# Altium PCB HeadingUnit.PcbDoc
Units mm, origin at the board's own origin, x right, y up, seen from the top; angles counter-clockwise.
Board outline 35 x 50 mm, 2 copper layers (Top Layer, Bottom Layer); 42 components, 35 nets, 183 pads, 53 vias.
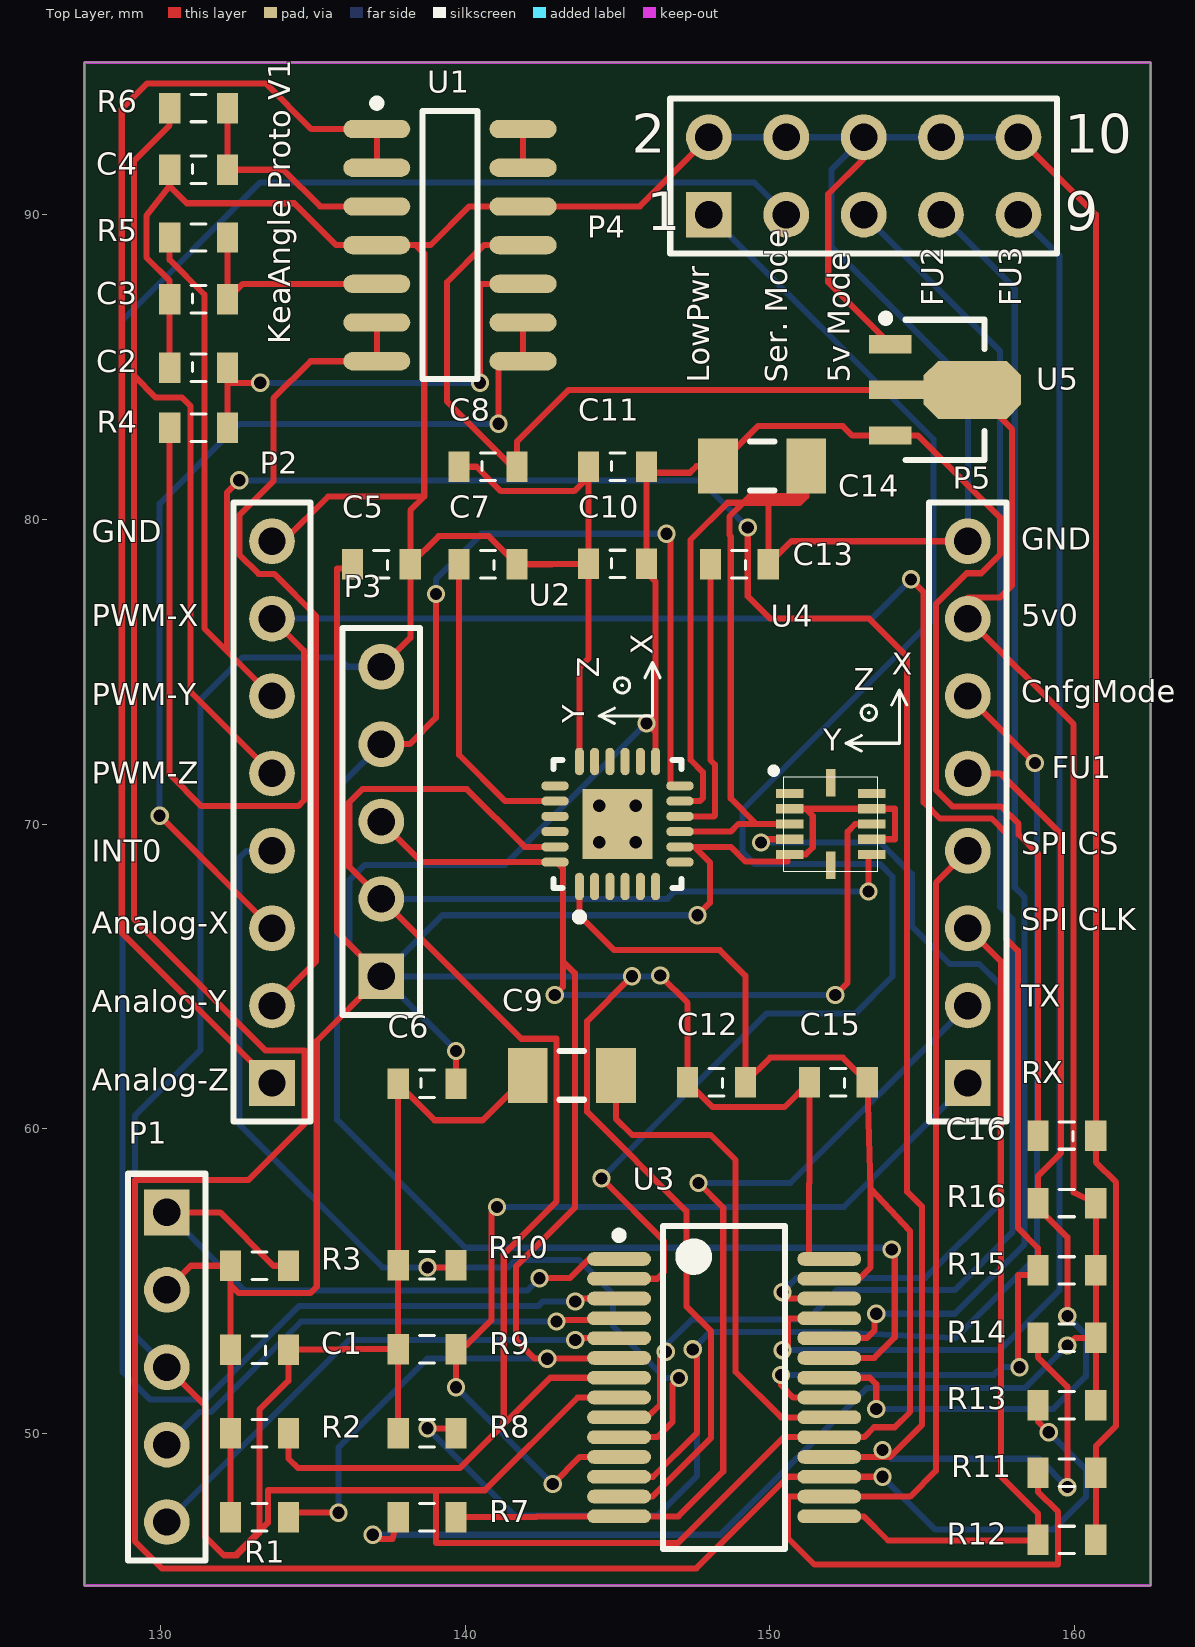
[diagram p0: Top Layer view]
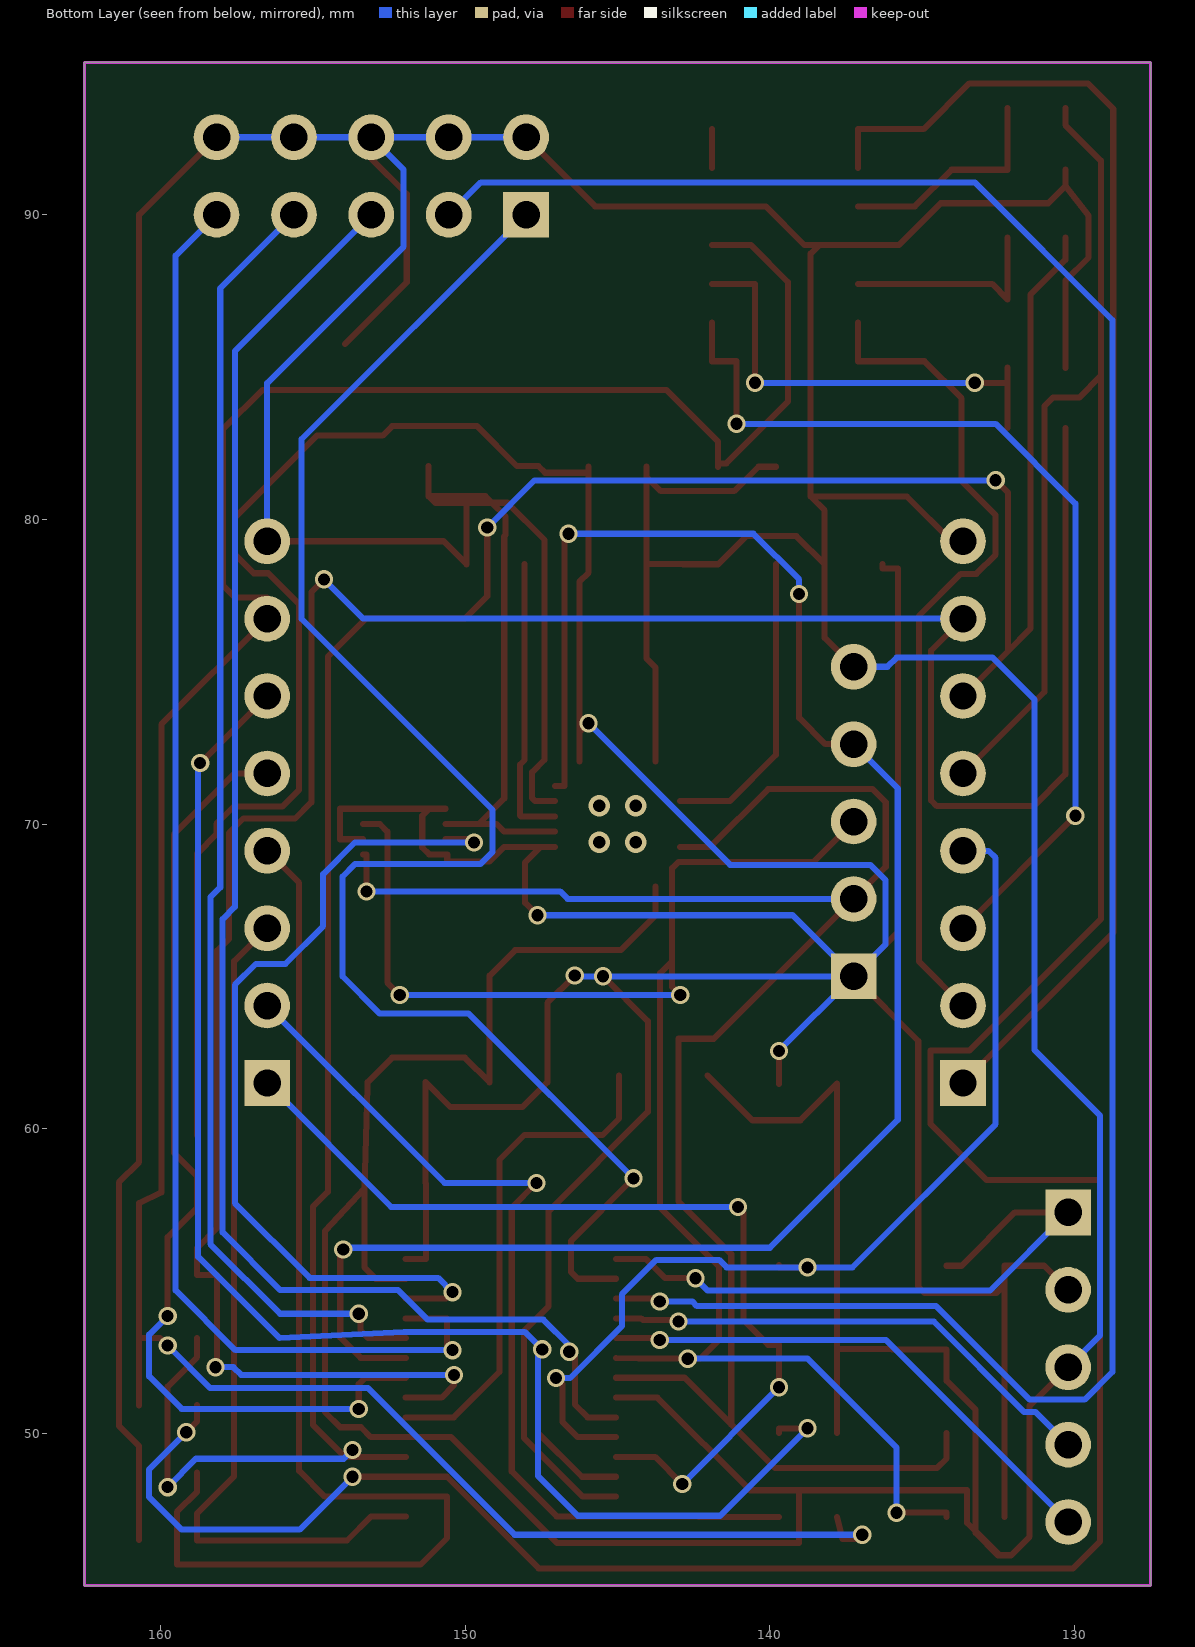
[diagram p1: Bottom Layer view, seen from below]
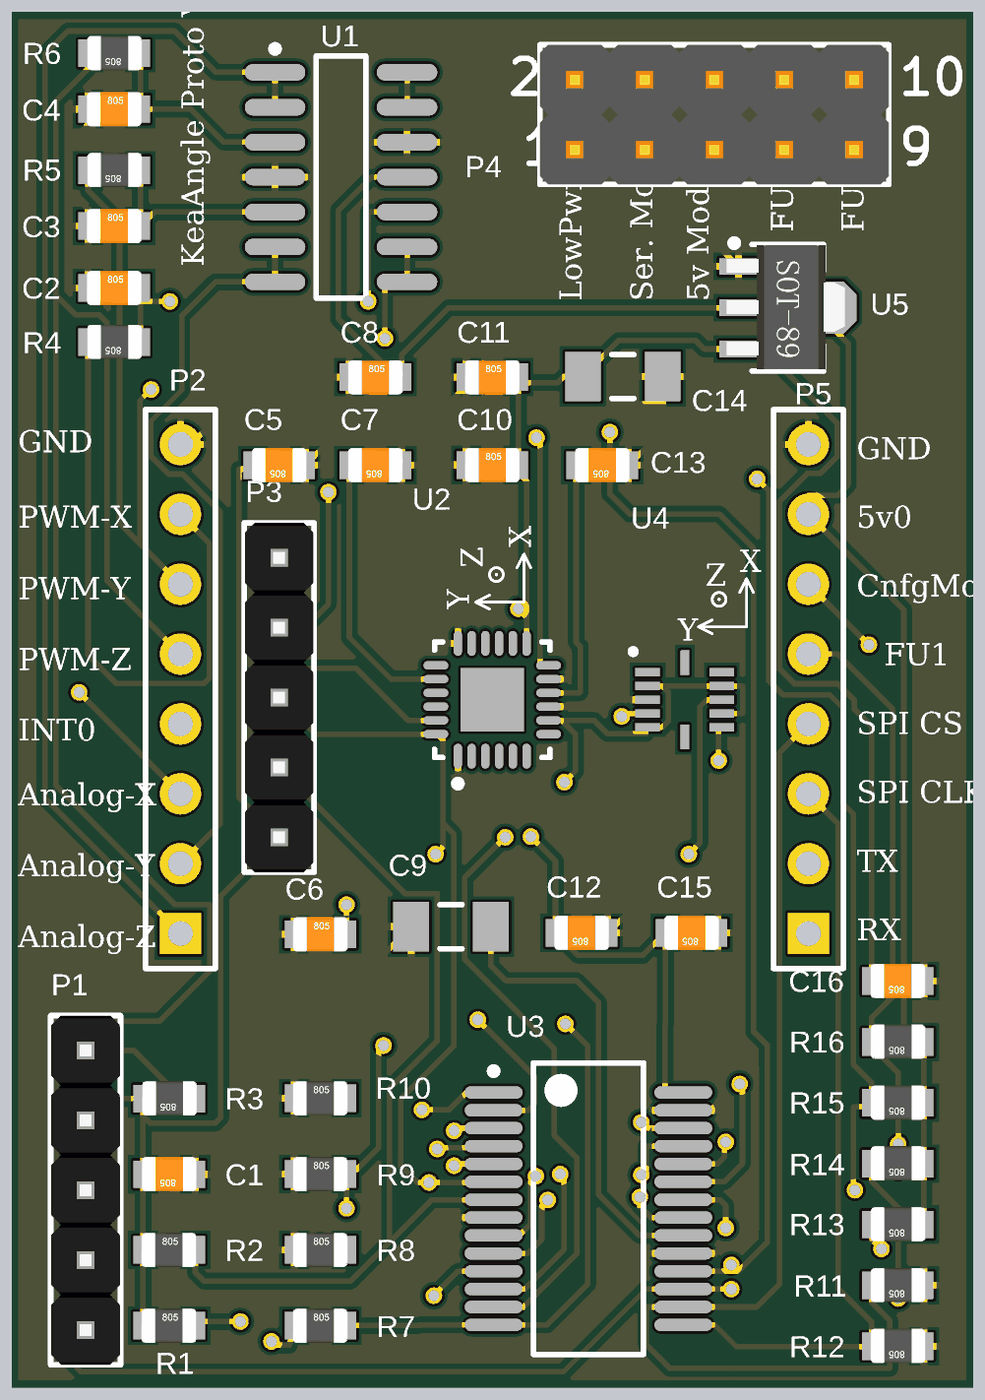
[diagram p2: 3D render of the assembled board from above, using the file's embedded part models]

## Layer stack, top to bottom
Top Layer: signal copper 0.0356
Dielectric: dielectric 0.32, FR-4, Dk 4.8
Bottom Layer: signal copper 0.0356

## Board outline
127.5,45 162.5,45 162.5,95 127.5,95

## Design rules (kind name [scope] priority, off if disabled: settings)
Clearance [All] p1: gap=0.2
HoleToHoleClearance [All] p1: gap=0.2 allowstackedmicrovias=TRUE
MinimumAnnularRing [All] p1: minimumring=0.1
MinimumSolderMaskSliver [All] p1: minsoldermaskwidth=0.2
PolygonConnect [All] p1: connectstyle=Relief reliefconductorwidth=0.254 reliefentries=4 polygonreliefangle="90 Angle"
RoomDefinition "U_Regulator 3v3-250mA MCP1702" [InComponentClass('U_Regulator 3v3-250mA MCP1702')] p1 off: confinementstyle=ConfineIn formatcopy=TRUE lockcomponents=FALSE outline 137.975,98.95 169.975,98.95 169.975,107.95 137.975,107.95
RoomDefinition "U_PIC programmer in-circuit" [InComponentClass('U_PIC programmer in-circuit')] p2 off: confinementstyle=ConfineIn formatcopy=TRUE lockcomponents=FALSE outline 129,113 150,113 150,130 129,130
RoomDefinition "U_GYRO 3-AXIS - ITG-3200" [InComponentClass('U_GYRO 3-AXIS - ITG-3200')] p3 off: confinementstyle=ConfineIn formatcopy=TRUE lockcomponents=FALSE outline 172,115 233,115 233,132 172,132
RoomDefinition "U_Accelerometer 3-AXIS - BMA180" [InComponentClass('U_Accelerometer 3-AXIS - BMA180')] p4 off: confinementstyle=ConfineIn formatcopy=TRUE lockcomponents=FALSE outline 184.35,85 211.35,85 211.35,107 184.35,107
RoomDefinition "main_gyro+acc only" [InComponentClass('main_gyro+acc only')] p5 off: confinementstyle=ConfineIn formatcopy=TRUE lockcomponents=FALSE outline 54,13.95 232,13.95 232,38.95 54,38.95
RoutingPriority RoutingPriority_1 [(InNet('SDA') AND InNet('SCL'))] p1: routingpriority=1
RoutingPriority [All] p2: routingpriority=2
RoutingVias [All] p1: holewidth=0.4 width=0.6 viastyle="Through Hole" minholewidth=0.4 minwidth=0.6 maxholewidth=1.4 maxwidth=2
SMDNeckDown [All] p1: percent=100.000
SilkToSilkClearance [All] p1: silktosilkclearance=0.2
SilkscreenOverComponentPads [All] p1 off: minsilkscreentomaskgap=0.254
SolderMaskExpansion [All] p1: expansion=0.102
SupplyNets [InNet('GND')] p1: voltage=0.000
Width [All] p1: maxlimit=2 minlimit=0.2 preferedwidth=0.2
23 further rules are at their usual default settings.

## Classes and differential pairs
component class "U_Regulator 3v3-250mA MCP1702": C8 C11 C14 U5
component class "U_PIC programmer in-circuit": C1 P1 R3
component class "U_GYRO 3-AXIS - ITG-3200": C6 C7 C10 C13 P3 R1 R2 U2
component class "U_Accelerometer 3-AXIS - BMA180": C12 C15 U4
component class "main_gyro+acc only": C2 C3 C4 C5 C9 C16 P2 P4 P5 R4 R5 R6 R7 R8 R9 R10 R11 R12 R13 R14 R15 R16 U1 U2.3 U3

## Components (designator, comment, footprint, x,y, rotation, side; value= is the part's Value field where it differs from the comment)
C1 "100n" C0805 133.25,52.723 r180 top (schematic designator C6)
C2 "100n" C0805 131.25,85 r0 top (schematic designator C4)
C3 "100n" C0805 131.25,87.25 r0 top
C4 "100n" C0805 131.25,91.5 r0 top (schematic designator C2)
C5 "100n" C0805 137.25,78.5 r180 top (schematic designator C14)
C6 "100n" C0805 138.75,61.5 r0 top (schematic designator C10)
C7 "2n2" C0805 140.75,78.5 r180 top (schematic designator C9)
C8 "100n" C0805 140.75,81.75 r0 top (schematic designator C11)
C9 "10uF" C1206 143.5,61.75 r0 top (schematic designator C1)
C10 "10n" C0805 145,78.56 r0 top (schematic designator C7)
C11 "100n" C0805 145,81.75 r0 top (schematic designator C12)
C12 "22n" C0805 148.25,61.5 r180 top (schematic designator C6)
C13 "100n" C0805 149,78.5 r180 top (schematic designator C8)
C14 "10uF" C1206 149.75,81.75 r180 top (schematic designator C13)
C15 "22n" C0805 152.25,61.5 r180 top (schematic designator C5)
C16 "100n" C0805 159.75,59.75 r180 top (schematic designator C15)
P1 "Pin Header" PH1x5_2.54 130.21,57.25 r270 top
P2 "Pin Header" PH1x8_2.54 133.66,61.5 r90 top
P3 "Pin Header" PH1x5_2.54 137.25,65 r90 top (schematic designator P5)
P4 "Pin Header" PH2x5_2.54 148,90 r0 top (schematic designator P3)
P5 "Pin Header" PH1x8_2.54 156.5,61.5 r90 top (schematic designator P1)
R1 "RESISTOR" R0805 133.25,47.25 r0 top (schematic designator R14)
R2 "RESISTOR" R0805 133.25,50.007 r0 top (schematic designator R15)
R3 "RESISTOR" R0805 133.25,55.5 r180 top (schematic designator R1)
R4 "RESISTOR" R0805 131.25,83 r180 top (schematic designator R13)
R5 "RESISTOR" R0805 131.25,89.25 r180 top (schematic designator R12)
R6 "RESISTOR" R0805 131.25,93.5 r180 top (schematic designator R11)
R7 "RESISTOR" R0805 138.75,47.25 r0 top (schematic designator R4)
R8 "RESISTOR" R0805 138.75,50.007 r0 top (schematic designator R2)
R9 "RESISTOR" R0805 138.75,52.763 r0 top (schematic designator R3)
R10 "RESISTOR" R0805 138.75,55.52 r0 top (schematic designator R1)
R11 "RESISTOR" R0805 159.75,48.712 r180 top (schematic designator R6)
R12 "RESISTOR" R0805 159.75,46.5 r180 top (schematic designator R5)
R13 "RESISTOR" R0805 159.75,50.923 r180 top (schematic designator R7)
R14 "RESISTOR" R0805 159.75,53.135 r180 top (schematic designator R8)
R15 "RESISTOR" R0805 159.75,55.347 r180 top (schematic designator R9)
R16 "RESISTOR" R0805 159.75,57.558 r180 top (schematic designator R10)
U1 "OPAMP_QUAD" SOIC-14 139.5,89 r0 top (schematic designator U2)
U2 "GYRO 3-AXIS (ITG-3200)" "QFN50P400X400-24V2M - GYRO 3axis" 145,70 r90 top (schematic designator U4)
U3 "PIC24FJ32GA002-E/SS" SSOP-SS28_N 148.5,51.5 r0 top (schematic designator U1)
U4 "Accelerometer 3-AXIS (BMA180)" BMA180 152,70 r0 top (schematic designator U3)
U5 "MCP1702T-3302E/MB" SOT-89-MB3_N 155.75,84.25 r0 top

## Footprints (in the part's own frame and the unit in brackets; to place one, negate y for a bottom-side part, rotate by r counter-clockwise, add the part's x,y. Pads: shape width x height; smd on the part's side, far side on the other; paste and mask are expansions set on the pad)
BMA180 [mm]
  rect 0.9x0.3 smd: 1(-1.35,1) 2(-1.35,0.5) 3(-1.35,0) 4(-1.35,-0.5) 5(-1.35,-1) 7(1.35,-1) 8(1.35,-0.5) 9(1.35,0) 10(1.35,0.5) 11(1.35,1)
  rect 0.32x0.9 smd: 6(0,-1.35) 12(0,1.35)
  silkscreen extent -1.95,-1.55 2.5,4.4, body extent -1.55,-1.55 1.55,1.55, height 1
C0805 [mm] "Chip Capacitor; Body 2.0 x 1.2 mm (LxW typ)"
  rect 0.7x1 smd: 1(-0.95,-0.025) 2(0.95,-0.025)
  silkscreen extent -0.25,-0.47 0.25,0.42, body extent -1,-0.65 1,0.6, height 0.78
C1206 [mm] "Chip Capacitor, Body 3.2x1.6mm, IPC Medium Density"
  rect 1.3x1.8 smd: 1(-1.45,0) 2(1.45,0)
  silkscreen extent -0.4,-0.8 0.4,0.8, body extent -1.7,-0.9 1.7,0.9, height 1.35
PH1x5_2.54 [mm] "Connector; Header; 5 Position"
  rect 1.5x1.5 hole 0.9: 1(0,0)
  round 1.5 hole 0.9: 2(2.54,0) 3(5.08,0) 4(7.62,0) 5(10.16,0)
  silkscreen extent -1.27,-1.27 11.43,1.27, body extent -1.27,-1.25 11.43,1.25, height 8.52
PH1x8_2.54 [mm] "Connector; Header; 8 Position"
  rect 1.5x1.5 hole 0.9: 1(0,0)
  round 1.5 hole 0.9: 2(2.54,0) 3(5.08,0) 4(7.62,0) 5(10.16,0) 6(12.7,0) 7(15.24,0) 8(17.78,0)
  silkscreen extent -1.27,-1.27 19.05,1.27
PH2x5_2.54 [mm] "Connector; Header; 5x2 Position"
  rect 1.5x1.5 hole 0.9: 1(0,0)
  round 1.5 hole 0.9: 2(0,2.54) 3(2.54,0) 4(2.54,2.54) 5(5.08,0) 6(5.08,2.54) 7(7.62,0) 8(7.62,2.54) 9(10.16,0) 10(10.16,2.54)
  silkscreen extent -1.27,-1.27 11.43,3.81, body extent -1.27,-1.27 11.43,3.81, height 10.1
"QFN50P400X400-24V2M - GYRO 3axis" [mm] "QFN, 24-Leads, Body 4x4mm, Pitch 0.5mm, IPC Low Density"
  oval 0.9x0.3 smd: 1(-2.05,1.25) 2(-2.05,0.75) 3(-2.05,0.25) 4(-2.05,-0.25) 5(-2.05,-0.75) 6(-2.05,-1.25) 13(2.05,-1.25) 14(2.05,-0.75) 15(2.05,-0.25) 16(2.05,0.25) 17(2.05,0.75) 18(2.05,1.25)
  oval 0.3x0.9 smd: 7(-1.25,-2.05) 8(-0.75,-2.05) 9(-0.25,-2.05) 10(0.25,-2.05) 11(0.75,-2.05) 12(1.25,-2.05) 19(1.25,2.05) 20(0.75,2.05) 21(0.25,2.05) 22(-0.25,2.05) 23(-0.75,2.05) 24(-1.25,2.05)
  rect 2.3x2.3 smd: 25(0,0)
  silkscreen extent -3.17,-2.1 5.3,2.1, body extent -2.07,-2.07 2.07,2.07, height 1
R0805 [mm] "0805 SMD Resistor"
  rect 0.7x1 smd: 1(-0.95,0) 2(0.95,0)
  silkscreen extent -0.25,-0.45 0.25,0.45, body extent -1.01,-0.63 0.99,0.62, height 0.78
SOIC-14 [mm] "14-Pin Plastic Narrow Body Small Outline Integrated Circuit 1.27 mm Pitch, IPC Medium Density"
  oval 2.2x0.6 smd: 1(-2.4,3.81) 2(-2.4,2.54) 3(-2.4,1.27) 4(-2.4,0) 5(-2.4,-1.27) 6(-2.4,-2.54) 7(-2.4,-3.81) 8(2.4,-3.81) 9(2.4,-2.54) 10(2.4,-1.27) 11(2.4,0) 12(2.4,1.27) 13(2.4,2.54) 14(2.4,3.81)
  silkscreen extent -2.52,-4.4 0.9,4.78, body extent -1.95,-4.33 1.95,4.33, height 1.76
SOT-89-MB3_N [mm] "SOT89, 3-Leads, Body 4.5x2.4 mm, Pitch 1.5mm, Lead Span 4.1mm, IPC Medium Density"
  rect 1.4x0.6 smd: 1(-1.8,1.5) 3(-1.8,-1.5)
  rect 1.8x0.6 smd: 2(-1.6,0)
  oct 3.2x1.9 smd: 2(0.9,0)
  silkscreen extent -2.07,-2.3 1.3,2.47, body extent -2.22,-2.23 2.08,2.27, height 1.51
SSOP-SS28_N [mm] "SOP, 28-Leads, Body 10.2x5.2mm, Pitch 0.65mm, IPC Medium Density"
  oval 2.1x0.45 smd: 1(-3.45,4.225) 2(-3.45,3.575) 3(-3.45,2.925) 4(-3.45,2.275) 5(-3.45,1.625) 6(-3.45,0.975) 7(-3.45,0.325) 8(-3.45,-0.325) 9(-3.45,-0.975) 10(-3.45,-1.625) 11(-3.45,-2.275) 12(-3.45,-2.925) 13(-3.45,-3.575) 14(-3.45,-4.225) 15(3.45,-4.225) 16(3.45,-3.575) 17(3.45,-2.925) 18(3.45,-2.275) 19(3.45,-1.625) 20(3.45,-0.975) 21(3.45,-0.325) 22(3.45,0.325) 23(3.45,0.975) 24(3.45,1.625) 25(3.45,2.275) 26(3.45,2.925) 27(3.45,3.575) 28(3.45,4.225)
  silkscreen extent -3.57,-5.3 2,5.3, body extent -2.7,-5.3 2.7,5.3, height 2

## Part data
P1 P3: library part PH1x5, "Con1x5"
P2 P5: library part PH1x8, "Con1x8"
P4: library part PH2x5, "Header, 5-Pin, Dual row"
R1 R2: library part 4K7, "Resistor"
R3 R7 R8 R9 R10 R11 R12 R13 R14 R15 R16: library part 10K, "Resistor"
R4 R5 R6: library part 1K, "Resistor"
U1: library part MCP6244-E/SN, "OpAmp"
U2: library part ITG-3200, "Gyro, 3-axis"
U3: "General Purpose 16-Bit Flash Microcontroller, 32KB Flash, 8KB SRAM, 28-Pin SSOP, Extended Temperature"
U4: library part BMA180
U5: "Power, 250 mA Low Quiescent Current LDO Regulator, 3-Pin SOT-89, Extended Temperature, Tape and Reel"

## Via types
v1: diameter 0.6, hole 0.4, Top Layer to Bottom Layer, 49 vias
v2: diameter 0.7, hole 0.4, Top Layer to Bottom Layer, tented top, 4 vias

## Nets (pads, with @x,y where several pads share a name; then routed paths per layer and width w, separated by ;. In a path a pad name is that pad's centre, name@x,y a point inside that pad or via, vN(x,y) a via of type N, cw(c..) or ccw(c..) an arc to the next point about the centre after c; other vN are vias at no path point)
3V3: C1.2 C5.2 C6.2 C10.2 C11.2 C12.2 C14.2 C15.2 C16.2 P1.2 P3.1 R1.1 R2.1 R3.2 U2.8 U2.13 U3.13 U3.28 U4.2 U4.5 U4.8 U4.10 U5.3 | length 177.6
  Top Layer w0.2: P1.2 131,55.5 R3.2 132.3,54.864 ; R1.1 R2.1 C1.2 132.3,54.864 ; C5.2 136.3,78.384 135.788,78.384 135.788,66.462 P3.1 135.128,62.878 135.128,54.813 134.925,54.61 132.554,54.61 132.3,54.864 ; C6.2 v1(139.7,62.55) ; U3.13 146.147,47.925 148.072,49.851 148.072,53.356 147.26,54.169 147.26,57.294 144,60.554 144,63.527 v1(145.473,65) ; v1(145.95,73.306) 146.25,73.006 ; C11.2 C11.2@145.95,81.53 ; U2.13 146.25,73.006 ; v1(146.406,65.024) 147.3,64.13 C12.2 148.119,60.706 150.481,60.706 C15.2 151.3,58.217 151.282,58.199 151.282,55.725 U3.28 ; U2.8 147.523,69.25 ; v1(147.625,67.005) 148.031,67.412 148.031,68.742 147.523,69.25 ; U4.2 151.181,70.5 ; U4.8 154.102,69.5 154.102,70.5 U4.10 151.181,70.5 ; C16.2 158.8,69.03 158.166,69.665 158.166,70.002 157.588,70.58 155.99,70.58 155.45,71.12 155.45,77.216 156.464,78.23 156.938,78.23 157.55,78.842 157.55,80.067 154.867,82.75 U5.3 152.708,82.75 152.4,83.058 149.608,83.058 C14.2 147.595,81.75 147.375,81.53 C11.2@145.95,81.53 ; C11.2@145.95,81.53 C10.2 145.95,78.25 146.25,77.95 146.25,73.006 ; 147.523,69.25 148.717,69.25 149.198,68.769 150.586,68.769 150.586,69 U4.5 151.181,69 151.409,69.229 151.409,70.271 151.181,70.5
  Bottom Layer w0.2: v1(139.7,62.55) P3.1 ; v1(145.95,73.306) 141.3,68.656 136.703,68.656 136.2,68.153 136.2,66.05 P3.1 ; v1(146.406,65.024) 146.382,65 v1(145.473,65) P3.1 ; v1(147.625,67.005) 139.255,67.005 P3.1
5V0: C8.2 P5.7 R7.1 R13.1 R14.1 R15.1 R16.1 U1.11 U5.2 | length 91.4
  Top Layer w0.2: v1(136.969,46.672) 137.109,46.533 137.617,46.533 R7.1 ; C8.2 C8.2@141.7,81.839 ; U1.11 140.614,89 139.405,87.79 139.405,83.861 141.427,81.839 C8.2@141.7,81.839 ; v1(159.766,52.883) 160.018,53.135 R14.1 ; R13.1 R14.1 ; C8.2@141.7,81.839 141.7,82.55 143.4,84.25 154.15,84.25 156.65,84.25 157.95,82.95 157.95,77.83 157.55,77.43 156.5,77.43 P5.7 159.969,73.271 159.969,57.912 R16.1 R15.1 R14.1
  Bottom Layer w0.2: v1(136.969,46.672) 148.374,46.672 153.187,51.486 158.369,51.486 v1(159.766,52.883)
DAC-OUT1: P2.1 U1.1 U1.2 | length 44.6
  Top Layer w0.2: P2.1 128.727,66.433 128.727,93.472 129.565,94.31 133.452,94.31 134.952,92.81 U1.1 U1.2
DAC-OUT2: P2.2 U1.6 U1.7 | length 27.5
  Top Layer w0.2: P2.2 135.11,65.49 135.11,76.828 133.731,78.207 133.223,78.207 132.588,78.842 132.588,80.137 133.706,81.255 133.706,83.971 134.925,85.19 U1.7 U1.6
DAC-OUT3: P2.3 U1.8 U1.9 | length 31.8
  Top Layer w0.2: v1(129.972,70.268) P2.3 ; v1(141.097,83.134) 141.097,85.19 U1.8 U1.9
  Bottom Layer w0.2: v1(129.972,70.268) 129.972,80.518 132.588,83.134 v1(141.097,83.134)
EXTINTNEWDATA: P2.4 R10.2 U3.10 | length 33.1
  Top Layer w0.2: v1(138.76,55.448) 139.7,55.448 R10.2 ; U3.10 146.304,49.875 146.8,50.371 146.8,51.613 147.003,51.816 v1(147.015,51.816)
  Bottom Layer w0.2: P2.4 132.823,69.12 132.588,68.885 132.588,60.147 137.287,55.448 v1(138.76,55.448) 141.421,55.448 141.665,55.693 143.723,55.693 144.856,54.559 144.856,53.518 146.558,51.816 v1(147.015,51.816)
EXTMODESERIAL: P5.6 R8.2 U3.12 | length 53.8
  Top Layer w0.2: v1(138.76,50.165) 139.7,50.165 R8.2 ; U3.12 146.165,48.575 147.615,50.026 147.615,52.613 v1(147.472,52.756) ; P5.6 v1(158.699,72.001)
  Bottom Layer w0.2: v1(138.76,50.165) 141.63,47.295 146.304,47.295 147.615,48.606 147.615,52.613 v1(147.472,52.756) 148.047,53.33 152.003,53.33 156.095,53.13 158.763,55.798 158.763,71.937 v1(158.699,72.001)
FUTURECHOICE1: P4.7 U3.24 | length 42.9
  Top Layer w0.2: U3.24 153.187,53.125 153.441,53.379 153.441,53.873 v1(153.492,53.924)
  Bottom Layer w0.2: v1(153.492,53.924) 156.077,53.924 158.363,56.21 158.363,67.596 158.039,67.92 158.039,87.581 P4.7
FUTURECHOICE2: P4.9 U3.25 | length 48.2
  Top Layer w0.2: v1(150.419,52.73) 150.597,52.908 150.597,53.775 U3.25
  Bottom Layer w0.2: v1(150.419,52.73) 157.54,52.73 159.502,54.692 159.502,88.658 P4.9
FUTURERPX1: P5.5 R16.2 U3.22 | length 32.4
  Top Layer w0.2: U3.22 153.28,51.825 153.492,51.613 v1(153.492,50.8) ; P5.5 157.563,71.66 159.563,69.66 159.563,59.208 158.8,58.445 R16.2 158.8,57.404 159.766,56.438 v1(159.766,53.848)
  Bottom Layer w0.2: v1(153.492,50.8) 159.309,50.8 160.376,51.867 160.376,53.238 v1(159.766,53.848)
GND: C1.1 C2.1 C3.1 C4.1 C5.1 C6.1 C7.1 C8.1 C9.1 C10.1 C11.1 C12.1 C13.1 C14.1 C15.1 C16.1 P1.3 P2.8 P3.5 P4.2 P4.4 P4.6 P4.8 P4.10 P5.8 R8.1 R9.1 R10.1 R11.1 R12.1 U1.4 U1.12 U2.1 U2.9 U2.11 U2.18 U3.8 U3.19 U3.27 U4.3 U5.1 | length 322.2
  Top Layer w0.2: P1.3 131.47,50.91 131.47,46.609 132.08,45.999 132.461,45.999 ; C2.1 C3.1 130.3,87.833 129.54,88.593 129.54,89.967 130.3,90.934 ; C4.1 130.3,90.934 ; P2.8 134.03,79.28 135.5,80.75 138.659,80.75 ; P3.5 138.2,76.11 C5.1 ; R8.1 R9.1 ; C8.1 140.373,81.725 141.173,80.924 143.574,80.924 C11.1@144.05,81.4 ; C9.1 140.575,60.275 139,60.275 C6.1 R10.1 R9.1 ; U2.1 143.75,67.005 144.893,65.862 148.362,65.862 149.2,65.024 C12.1 150.007,62.332 152.393,62.332 C15.1 153.2,61.366 153.3,58.042 ; U2.18 143.75,75.133 144.05,75.433 C10.1 ; C11.1 C11.1@144.05,81.4 ; U3.8 143.688,51.175 140.646,48.133 139.04,48.133 ; U2.9 148.717,69.75 148.967,70 149.555,70 ; U2.11 147.701,70.75 147.8,70.849 147.8,71.704 147.396,72.108 147.396,79.324 148.615,80.543 149.123,80.543 ; P4.2 145.73,90.27 U1.12 140.132,90.27 138.862,89 138.379,89 ; U4.3 149.555,70 ; C14.1 151.2,80.766 ; U3.27 152.933,55.075 153.3,55.442 153.3,58.042 ; P4.6 153.08,91.841 151.917,90.678 151.917,87.783 U5.1 ; P5.8 150.705,79.28 C13.1 149.95,80.543 ; P4.10 160.7,90 C16.1 160.7,58.903 161.366,58.236 161.366,50.247 160.7,49.581 R11.1 R12.1 ; 130.3,90.934 130.861,90.373 134.391,90.373 135.765,89 U1.4 138.379,89 ; 132.461,45.999 132.512,45.999 133.248,46.736 133.248,46.787 ; 132.461,45.999 133.248,46.787 ; 133.248,46.787 133.528,47.066 133.528,48.133 139.04,48.133 ; 133.248,46.787 133.248,50.775 134.2,51.726 C1.1 135.992,52.748 136.006,52.763 R9.1 ; C5.1 139.126,79.451 140.774,79.451 C7.1 142.85,78.525 142.859,78.535 C10.1 ; C5.1 138.2,80.291 138.659,80.75 ; 138.379,89 138.659,88.721 138.659,80.75 ; 139.04,48.133 139.04,46.406 146.99,46.406 150.459,49.875 U3.19 153.095,49.875 153.419,50.199 154.1,50.199 154.6,50.699 154.6,56.642 153.3,58.042 ; C10.1 C11.1@144.05,81.4 ; 149.123,80.543 149.337,80.757 151.191,80.757 ; 149.123,80.543 149.95,80.543 ; 149.123,80.543 148.676,80.096 148.676,79.48 148.717,79.439 148.717,70.838 149.555,70 ; 149.95,80.543 150.978,80.543 151.19,80.756 ; 149.95,80.543 151.19,80.756 ; 151.19,80.756 151.191,80.757 ; 151.19,80.756 151.2,80.757 ; 151.191,80.757 151.2,80.766 ; 151.191,80.757 151.2,80.757 ; 151.2,80.757 151.2,80.766
  Bottom Layer w0.2: P1.3 129.159,53.221 129.159,60.427 131.318,62.586 131.318,74.092 132.69,75.463 135.839,75.463 136.143,75.16 P3.5 ; P4.2 P4.4 P4.6 ; P5.8 156.5,84.47 152.019,88.951 152.019,91.479 P4.6 ; P4.10 P4.8 P4.6
INT1: U3.26 U4.4 | length 28.9
  Top Layer w0.2: v1(149.708,69.393) 149.815,69.5 U4.4 ; v1(150.419,54.635) 150.629,54.425 U3.26
  Bottom Layer w0.2: v1(149.708,69.393) 153.619,69.393 154.661,68.351 154.661,66.65 155.905,65.405 156.87,65.405 157.556,64.719 157.556,57.554 155.106,55.104 150.887,55.104 v1(150.419,54.635)
INT2: P3.4 U2.12 U3.23 | length 61.8
  Top Layer w0.2: P3.4 138.177,72.62 139.04,73.482 v1(139.04,77.546) ; v1(146.609,79.527) 146.736,79.4 146.736,71.25 U2.12 ; U3.23 153.428,52.475 154.1,53.147 154.1,55.933 v1(154,56.032)
  Bottom Layer w0.2: P3.4 135.8,71.17 135.8,60.288 139.995,56.093 153.94,56.093 v1(154,56.032) ; v1(139.04,77.546) 139.04,78.029 140.538,79.527 v1(146.609,79.527)
JP-LOWPWR: P4.1 U3.2 | length 52.9
  Top Layer w0.2: v1(144.475,58.369) 146.533,56.312 146.533,55.304 146.304,55.075 U3.2
  Bottom Layer w0.2: v1(144.475,58.369) 149.885,63.779 152.806,63.779 154.026,64.999 154.026,68.275 153.619,68.682 149.504,68.682 149.098,69.088 149.098,70.46 155.372,76.733 155.372,82.628 P4.1
JP-MODE3V3OR5\V\0\: P4.5 U3.9 | length 51.9
  Top Layer w0.2: U3.9 145.978,50.525 146.4,50.947 146.4,52.496 v1(146.583,52.68)
  Bottom Layer w0.2: v1(146.583,52.68) 146.583,52.883 147.431,53.73 151.23,53.73 152.203,54.704 156.069,54.704 157.963,56.597 157.963,66.878 157.556,67.285 157.556,85.524 P4.5
JP-SERIALMODEUARTORS\P\I\: P4.3 U3.3 | length 76.7
  Top Layer w0.2: v1(143.612,54.331) 143.706,54.425 U3.3
  Bottom Layer w0.2: v1(143.612,54.331) 142.545,54.331 142.392,54.178 134.544,54.178 131.47,51.105 129.667,51.105 128.753,52.019 128.753,86.538 133.274,91.059 149.481,91.059 P4.3
M\C\L\R\: P1.1 R3.1 U3.1 | length 21
  Top Layer w0.2: P1.1 131.955,57.25 133.705,55.5 R3.1 ; v1(142.443,55.093) 143.434,55.093 144.066,55.725 U3.1
  Bottom Layer w0.2: P1.1 132.774,54.686 142.037,54.686 v1(142.443,55.093)
NetC2_2: C2.2 R4.1 U1.10 | length 14.9
  Top Layer w0.2: R4.1 C2.2@132.2,84.48 ; C2.2 C2.2@132.2,84.48 ; v1(133.274,84.48) C2.2@132.2,84.48 ; v1(140.487,84.48) 140.487,87.73 U1.10
  Bottom Layer w0.2: v1(133.274,84.48) v1(140.487,84.48)
NetC3_2: C3.2 R5.1 U1.5 | length 7.1
  Top Layer w0.2: R5.1 C3.2 132.705,87.73 U1.5
NetC4_2: C4.2 R6.1 U1.3 | length 7.4
  Top Layer w0.2: R6.1 C4.2 134.036,91.475 135.241,90.27 U1.3
NetC7_2: C7.2 U2.20 | length 10
  Top Layer w0.2: C7.2 139.8,72.265 141.315,70.75 U2.20
NetC9_2: C9.2 U3.20 | length 16.6
  Top Layer w0.2: C9.2 144.95,60.333 145.491,59.792 148.057,59.792 148.872,58.976 148.872,52.021 150.368,50.525 U3.20
NetC13_2: C13.2 U2.10 | length 9.5
  Top Layer w0.2: U2.10 148.167,70.25 148.2,70.283 148.2,71.95 148.05,72.1 C13.2
NetU1_13: U1.13 U1.14 | length 1.3
  Top Layer w0.2: U1.13 U1.14
PGC: P1.5 U3.5 | length 17.3
  Top Layer w0.2: v1(143.612,53.061) 143.676,53.125 U3.5
  Bottom Layer w0.2: P1.5 136.181,53.061 v1(143.612,53.061)
PGD: P1.4 U3.4 | length 16.6
  Top Layer w0.2: v1(143,53.67) 143.05,53.72 144.169,53.72 144.224,53.775 U3.4
  Bottom Layer w0.2: P1.4 131.278,50.698 131.648,50.698 134.62,53.67 v1(143,53.67)
PWM1: P2.5 R6.2 R13.2 U3.17 | length 108.2
  Top Layer w0.2: R6.2 130.3,92.937 129.134,91.77 129.134,84.709 ; P2.5 130.988,74.332 130.988,83.718 130.708,83.998 129.845,83.998 129.134,84.709 ; v1(153.695,48.575) U3.17 150.597,48.575 147.589,45.568 130.048,45.568 129.159,46.457 129.159,58.318 132.893,58.318 134.722,60.147 134.722,62.56 133.452,62.56 129.134,66.878 129.134,84.709 ; R13.2 158.8,50.394 v1(159.156,50.038)
  Bottom Layer w0.2: v1(153.695,48.575) 155.433,46.838 159.309,46.838 160.376,47.904 160.376,48.819 v1(159.156,50.038)
PWM2: P2.6 R5.2 R14.2 U3.18 | length 89
  Top Layer w0.2: R5.2 130.3,88.519 131.445,87.374 131.445,76.415 132.182,75.678 ; v1(132.588,81.28) 132.182,80.874 132.182,75.678 ; P2.6 132.182,75.678 ; v1(149.276,79.728) 149.276,77.474 150,76.75 153.25,76.75 154.508,75.492 154.508,57.931 155,57.439 155,50.276 153.949,49.225 153.467,49.225 ; U3.18 153.467,49.225 ; v1(153.695,49.454) 153.467,49.225 ; R14.2 158.8,52.502 159.766,51.536 v1(159.766,48.235)
  Bottom Layer w0.2: v1(132.588,81.28) 147.724,81.28 v1(149.276,79.728) ; v1(153.695,49.454) 153.984,49.165 158.836,49.165 v1(159.766,48.235)
PWM3: P2.7 R4.2 R15.2 U3.21 | length 83.5
  Top Layer w0.2: R4.2 130.3,71.63 131.343,70.587 134.518,70.587 134.71,70.778 134.71,75.69 P2.7 ; v1(150.368,51.918) 150.368,51.581 150.774,51.175 U3.21 ; v1(154.635,78.029) 155.05,77.614 155.05,70.714 155.583,70.18 157.277,70.18 157.758,69.699 157.758,66.224 158.14,65.842 158.14,56.744 158.8,56.084 R15.2 158.8,55.194 158.14,55.194 158.14,52.222 v1(158.191,52.172)
  Bottom Layer w0.2: P2.7 153.346,76.74 v1(154.635,78.029) ; v1(150.368,51.918) 157.352,51.918 157.606,52.172 v1(158.191,52.172)
SCL: P3.2 R2.2 U2.23 U3.7 U4.7 | length 62.8
  Top Layer w0.2: R2.2 134.2,49.174 134.51,48.864 139.835,48.864 141.265,50.295 ; U2.23 141.951,69.25 140.056,71.145 136.627,71.145 136.195,70.714 136.195,68.595 P3.2 141.84,62.95 143.002,62.95 143.002,57.617 141.265,55.88 141.265,50.295 ; U3.7 142.795,51.825 141.265,50.295 ; v1(153.238,67.788) 153.238,69 U4.7
  Bottom Layer w0.2: P3.2 146.633,67.54 146.881,67.788 v1(153.238,67.788)
SDA: P3.3 R1.2 U2.24 U3.6 U4.9 | length 55.5
  Top Layer w0.2: R1.2 134.2,47.396 v1(135.839,47.396) ; P3.3 138.58,68.75 U2.24 143.002,68.75 143.205,68.547 143.205,65.502 ; v1(142.941,64.389) 143.205,64.653 143.205,65.502 ; U3.6 144.304,52.45 v1(142.697,52.45) 142.286,52.45 141.665,53.07 141.665,55.474 143.6,57.408 143.6,65.107 143.205,65.502 ; v1(152.146,64.389) 152.552,64.795 152.552,69.748 152.804,70 U4.9
  Bottom Layer w0.2: v1(135.839,47.396) 135.839,49.53 138.759,52.45 v1(142.697,52.45) ; v1(142.941,64.389) v1(152.146,64.389)
SPI-SOFT-C\S\: P5.4 R11.2 U3.16 | length 39.9
  Top Layer w0.2: P5.4 155.448,68.068 155.448,48.768 154.605,47.925 U3.16 150.597,47.925 150.597,46.558 151.46,45.695 159.461,45.695 159.461,47.421 158.8,48.082 R11.2
SPI-SOFT-CLK: P5.3 R12.2 U3.15 | length 28.2
  Top Layer w0.2: U3.15 153.086,47.275 153.879,46.482 158.8,46.482 R12.2 158.8,47.371 157.582,48.589 157.582,65.498 P5.3
UART-MISO: P5.1 R9.2 U3.11 | length 30.9
  Top Layer w0.2: v1(139.7,51.511) R9.2 139.7,52.908 140.056,52.908 140.859,53.712 140.859,57.242 v1(141.046,57.429) ; v1(142.875,48.336) 143.764,49.225 U3.11
  Bottom Layer w0.2: v1(139.7,51.511) v1(142.875,48.336) ; v1(141.046,57.429) 152.429,57.429 P5.1
UART-MOSI: P5.2 R7.2 U3.14 | length 30.5
  Top Layer w0.2: R7.2 142.342,47.25 142.367,47.275 U3.14 146.999,47.275 148.472,48.748 148.472,57.404 v1(147.66,58.217)
  Bottom Layer w0.2: v1(147.66,58.217) 150.677,58.217 P5.2
pads on no net: U2.2 U2.3 U2.4 U2.5 U2.6 U2.7 U2.14 U2.15 U2.16 U2.17 U2.19 U2.21 U2.22 U2.25 U4.1 U4.6 U4.11 U4.12
copper on no net:
  other v2: 144.4,69.4 145.6,69.4 144.4,70.6 145.6,70.6

## Polygon pours and split planes (outlines as drawn)
GND on Top Layer "Bottom Layer-No Net" (solid, remove dead copper, shelved, pour order 2): 127.5,95 127.5,45 162.5,45 162.5,95
GND on Bottom Layer "Bottom Layer-No Net" (solid, remove dead copper, shelved, pour order 4): 127.5,95 127.5,45 162.5,45 162.5,95

## Keep-outs
Keep-Out Layer:
  the board outline again, w0.1

## Silkscreen, mask and mechanical layers (free items; w line width, h text height)
Top Overlay:
  text "FU2" at 155.938,87 h1.25 r90
  text "FU3" at 158.5,86.995 h1.25 r90
  text "KeaAngle Proto V1" at 134.5,85.75 h1.25 r90
  text "LowPwr" at 148.25,84.49 h1.25 r90
  text "Ser. Mode" at 150.825,84.49 h1.25 r90
  text "5v Mode" at 152.873,84.49 h1.25 r90
  text "GND" at 127.75,79 h1.25
  text "GND" at 158.25,78.75 h1.25
  text "PWM-X" at 127.75,76.25 h1.25
  text "5v0" at 158.25,76.252 h1.25
  text "CnfgMode" at 158.25,73.754 h1.25
  text "PWM-Y" at 127.75,73.658 h1.25
  text "FU1" at 159.25,71.256 h1.25
  text "PWM-Z" at 127.75,71.08 h1.25
  text "SPI CS" at 158.25,68.758 h1.25
  text "INT0" at 127.75,68.516 h1.25
  text "SPI CLK" at 158.25,66.26 h1.25
  text "Analog-X" at 127.75,66.156 h1.25
  text "TX" at 158.25,63.748 h1.25
  text "Analog-Y" at 127.75,63.578 h1.25
  text "RX" at 158.25,61.25 h1.25
  text "Analog-Z" at 127.75,61 h1.25

## Text inside footprints (layer, text, board x,y; h text height)
P4: Top Overlay "10" at 159.684,92.032 h1.27; Top Overlay "9" at 159.684,89.492 h1.27; Top Overlay "1" at 145.968,89.492 h1.27; Top Overlay "2" at 145.46,92.032 h1.27
U2: Top Overlay "X" at 146.4,75.55 h1.25 r90; Top Overlay "Y" at 144.15,73.3 h1.25 r90; Top Overlay "Z" at 144.65,74.8 h1.25 r90
U4: Top Overlay "X" at 154,74.65 h1.25; Top Overlay "Y" at 151.75,72.15 h1.25; Top Overlay "Z" at 152.75,74.15 h1.25